# EAGLE board IoTKitV0.5 (EAGLE 6.5.0)
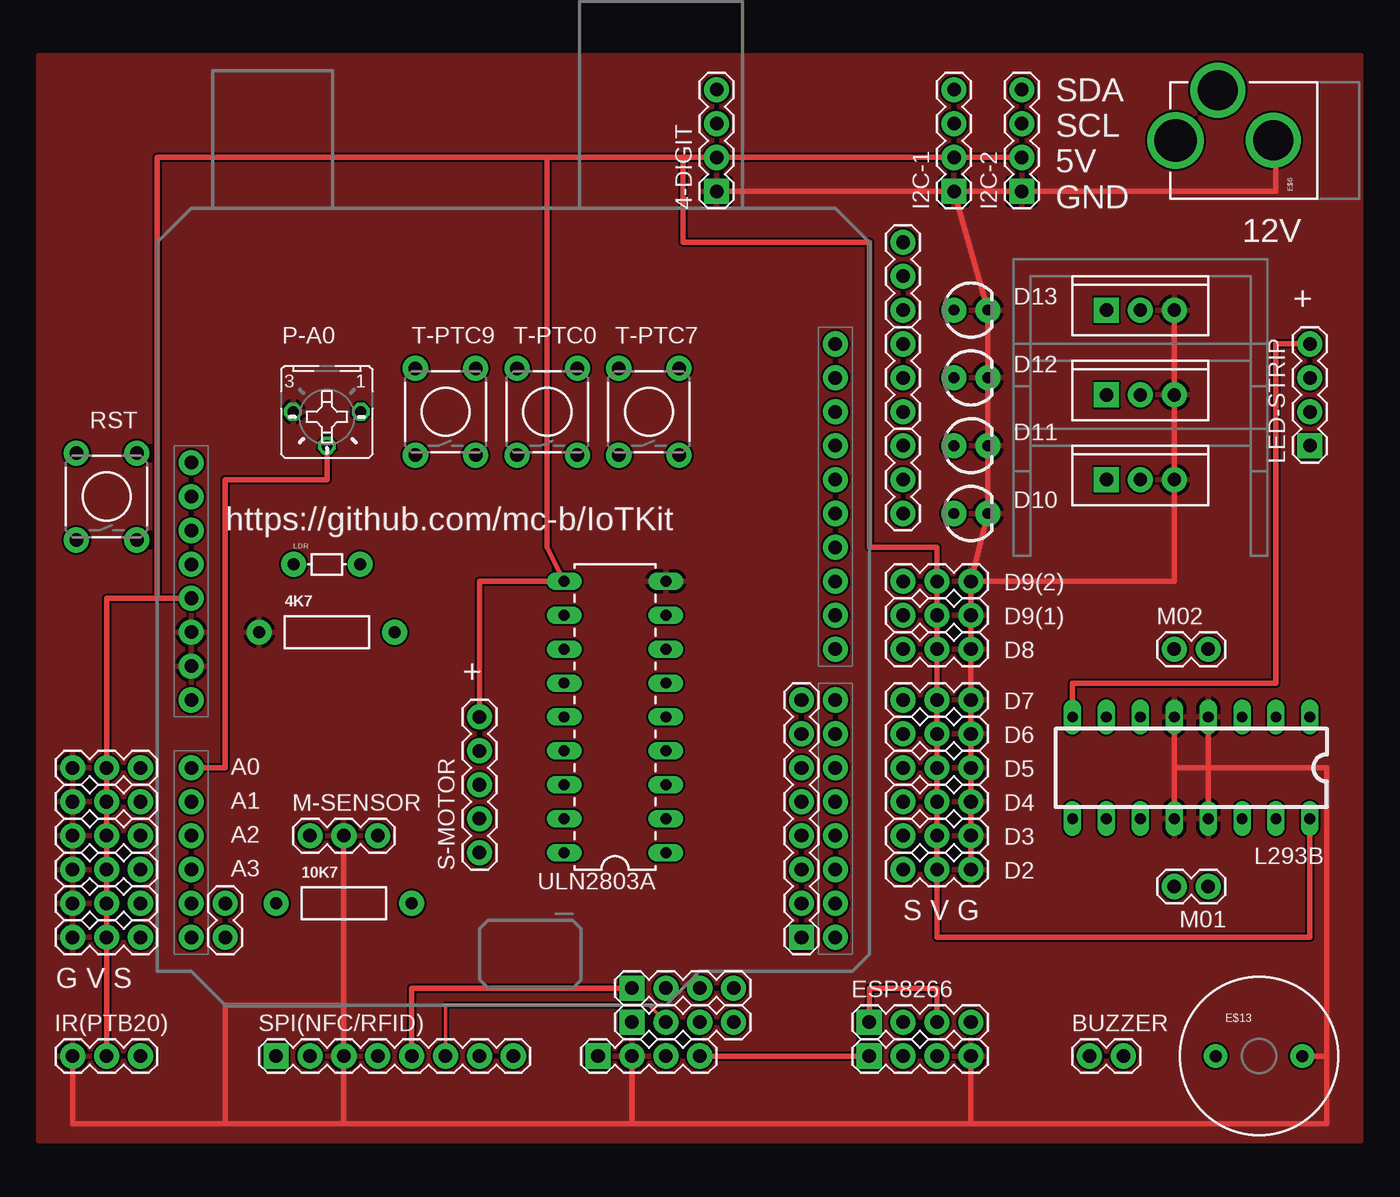
[diagram p0: board, top side]
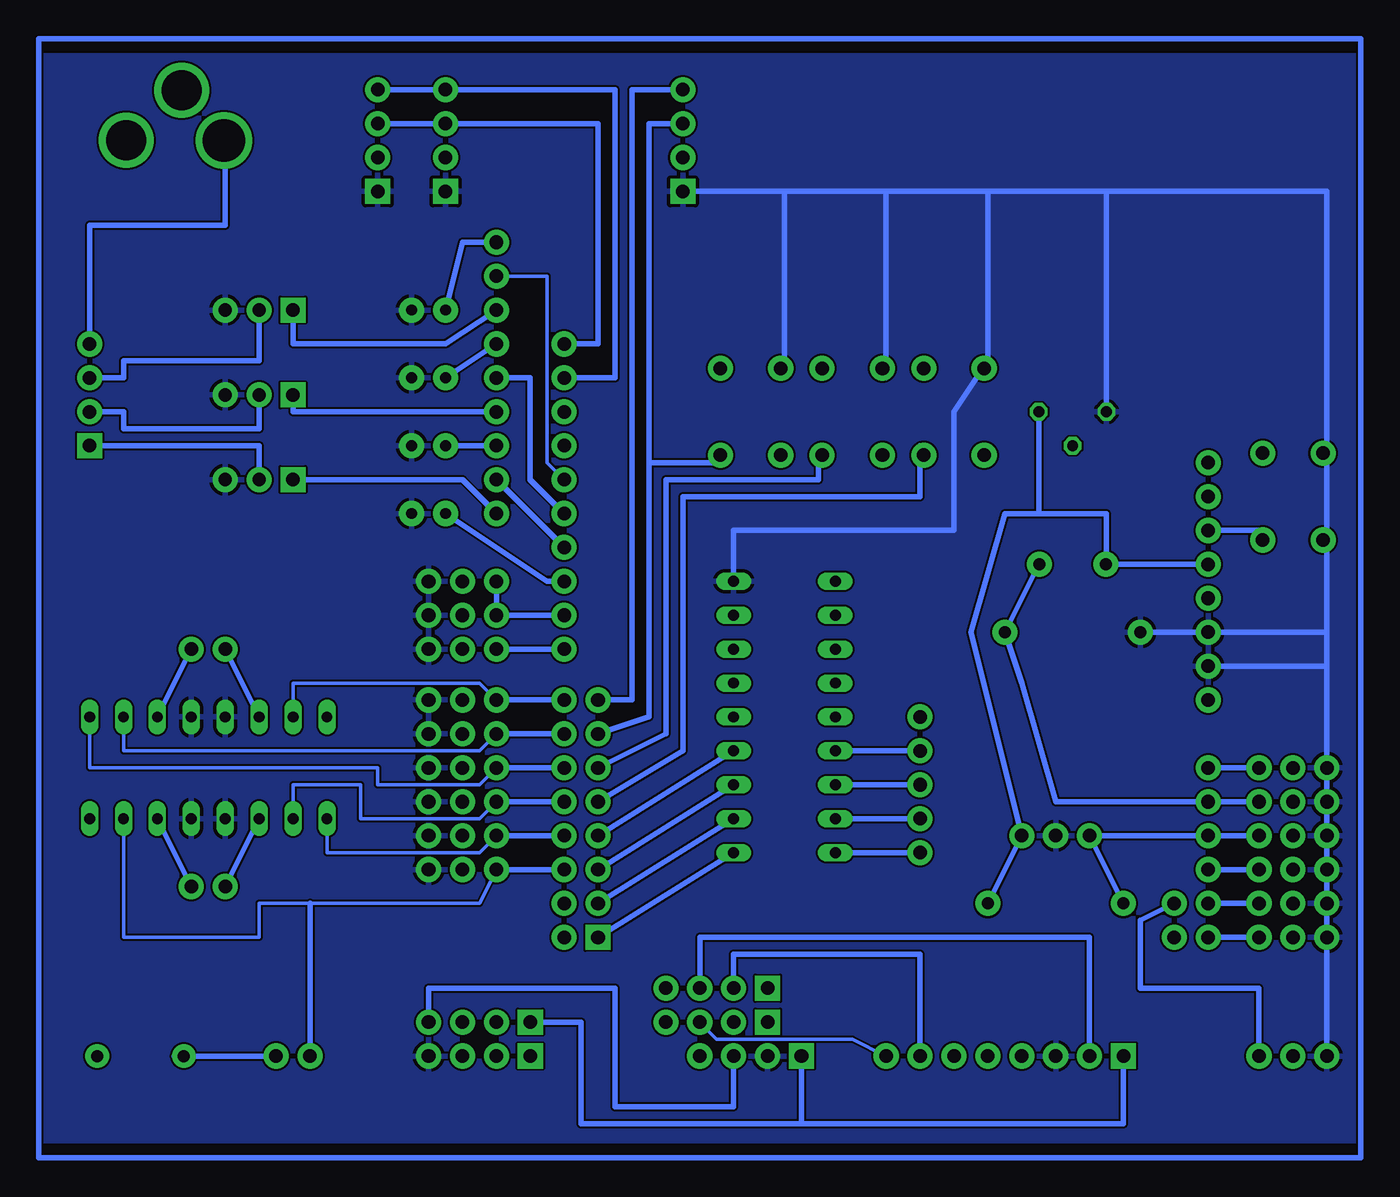
[diagram p1: board, bottom side, seen from below]

No outline drawn. Coordinates in mm, seen from the top.
Copper layers (1*16): Top 0.035mm / dielectric 1.5mm / Bottom 0.035mm
Design rules "Elecrow_2-layer_eagle_rule": minimum track width 6mil, minimum drill 12mil, track to track 6mil, track to pad 6mil, pad to pad 6mil, via to via 6mil, smd to smd 0mil, copper to edge 10mil, drill to drill 10mil, minimum pad ring 10mil, minimum via ring 6mil, stop-mask expansion 2mil, vias tented up to drill 100mil, thermal gap 10mil

## Footprints (pad centres in the part's own frame; a part is rotated, then mirrored left to right if it is on the bottom)
1X04 = drill 1.016 pad 1.88 square: 1 0,0 | drill 1.016 pad 1.88: 2 2.54,0; 3 5.08,0; 4 7.62,0
AXIAL-0.4 = drill 0.9 pad 1.88: P$1 -5.08,0; P$2 5.08,0
1X03 = drill 1.016 pad 1.88: 1 0,0; 2 2.54,0; 3 5.08,0
1X02 = drill 1.016 pad 1.88: 1 0,0; 2 2.54,0
LED3MM = drill 0.813 pad 1.88: A -1.27,0; K 1.27,0
UNO_R3_SHIELD_NOLABELS = drill 1.016 pad 1.88: 3.3V 50.8,26.67; 5V 50.8,29.21; A0 50.8,41.91; A1 50.8,44.45; A2 50.8,46.99; A3 50.8,49.53; A4 50.8,52.07; A5 50.8,54.61; AREF 2.54,15.24; D2 2.54,49.53; D3 2.54,46.99; D4 2.54,44.45; D5 2.54,41.91; D6 2.54,39.37; D7 2.54,36.83; D8 2.54,33.02; D9 2.54,30.48; D10 2.54,27.94; D11 2.54,25.4; D12 2.54,22.86; D13 2.54,20.32; GND@0 50.8,31.75; GND@1 50.8,34.29; GND@2 2.54,17.78; IOREF 50.8,21.59; NC 50.8,19.05; RES 50.8,24.13; RX 2.54,54.61; SCL 2.54,10.16; SDA 2.54,12.7; TX 2.54,52.07; VIN 50.8,36.83
TO220-IGO = drill 1 pad 1.88: GND 0,0; OUT 2.54,0 | drill 1 pad 1.88 square: IN -2.54,0
1X08 = drill 1.016 pad 1.88 square: 1 0,0 | drill 1.016 pad 1.88: 2 2.54,0; 3 5.08,0; 4 7.62,0; 5 10.16,0; 6 12.7,0; 7 15.24,0; 8 17.78,0
POWER_JACK_PTH_LOCK = drill 2.997 pad 4.115: GND 0.025,6.557; GNDBREAK 3.762,10.7 | drill 3.2 pad 4.115: PWR 0,13.878
BUZZER-12MM = drill 0.9 pad 1.778: + 3.25,0; - -3.25,0
DIL16 = drill 0.813 long: 1 -8.89,-3.81; 2 -6.35,-3.81; 3 -3.81,-3.81; 4 -1.27,-3.81; 5 1.27,-3.81; 6 3.81,-3.81; 7 6.35,-3.81; 8 8.89,-3.81; 9 8.89,3.81; 10 6.35,3.81; 11 3.81,3.81; 12 1.27,3.81; 13 -1.27,3.81; 14 -3.81,3.81; 15 -6.35,3.81; 16 -8.89,3.81
AXIAL-5MM = drill 0.9 pad 1.88: P$1 -2.5,0; P$2 2.5,0
B25P = drill 0.813 octagon: A -2.54,0; E 2.54,0; S 0,2.54
TACTILE-PTH = drill 1.016 pad 1.88: 1 -3.251,2.261; 2 3.251,2.261; 3 -3.251,-2.261; 4 3.251,-2.261
1X05 = drill 1.016 pad 1.88: 1 0,0; 2 2.54,0; 3 5.08,0; 4 7.62,0; 5 10.16,0
DIL18 = drill 0.813 long: 1 -10.16,-3.81; 2 -7.62,-3.81; 3 -5.08,-3.81; 4 -2.54,-3.81; 5 0,-3.81; 6 2.54,-3.81; 7 5.08,-3.81; 8 7.62,-3.81; 9 10.16,-3.81; 10 10.16,3.81; 11 7.62,3.81; 12 5.08,3.81; 13 2.54,3.81; 14 0,3.81; 15 -2.54,3.81; 16 -5.08,3.81; 17 -7.62,3.81; 18 -10.16,3.81

## Placement (x,y rotation side)
4-DIGIT  [1X04]  55.88,72.39 90 top
4K7  [AXIAL-0.4]  26.67,39.37 0 top
10K7  [AXIAL-0.4]  27.94,19.05 0 top
A0  [1X03]  12.7,29.21 180 top
A1  [1X03]  12.7,26.67 180 top
A2  [1X03]  12.7,24.13 180 top
A3  [1X03]  12.7,21.59 180 top
A4  [1X03]  12.7,19.05 180 top
A5  [1X03]  12.7,16.51 180 top
BUZZER  [1X02]  83.82,7.62 0 top
D2  [1X03]  69.85,21.59 0 top
D3  [1X03]  69.85,24.13 0 top
D4  [1X03]  69.85,26.67 0 top
D5  [1X03]  69.85,29.21 0 top
D6  [1X03]  69.85,31.75 0 top
D7  [1X03]  69.85,34.29 0 top
D8  [1X03]  69.85,38.1 0 top
D9(1)  [1X03]  69.85,40.64 0 top
D9(2)  [1X03]  69.85,43.18 0 top
D10  [LED3MM]  74.93,48.26 0 top
D11  [LED3MM]  74.93,53.34 0 top
D12  [LED3MM]  74.93,58.42 0 top
D13  [LED3MM]  74.93,63.5 0 top
E$1  [UNO_R3_SHIELD_NOLABELS]  67.31,71.12 180 top
E$2  [TO220-IGO]  87.63,57.15 0 top
E$3  [TO220-IGO]  87.63,63.5 0 top
E$4  [TO220-IGO]  87.63,50.8 0 top
E$5  [1X08]  62.23,16.51 90 top
E$6  [POWER_JACK_PTH_LOCK]  104.14,76.2 90 top
E$7  [1X03]  69.85,63.5 90 top
E$8  [1X02]  19.05,16.51 90 top
E$9  [1X03]  69.85,55.88 90 top
E$10  [1X04]  49.53,12.7 0 top
E$11  [1X04]  49.53,10.16 0 top
E$12  [1X04]  46.99,7.62 0 top
E$13  [BUZZER-12MM]  96.52,7.62 0 top
E$14  [1X04]  67.31,7.62 0 top
E$15  [1X03]  69.85,48.26 90 top
ESP8266  [1X04]  67.31,10.16 0 top
I2C-1  [1X04]  73.66,72.39 90 top
I2C-2  [1X04]  78.74,72.39 90 top
IR(PTB20)  [1X03]  7.62,7.62 0 top
L293B  [DIL16]  91.44,29.21 180 top
LDR  [AXIAL-5MM]  26.67,44.45 0 top
LED-STRIP  [1X04]  100.33,53.34 90 top
M01  [1X02]  92.71,20.32 180 top
M02  [1X02]  90.17,38.1 0 top
M-SENSOR  [1X03]  25.4,24.13 0 top
P-A0  [B25P]  26.67,55.88 180 top
RST  [TACTILE-PTH]  10.16,49.53 90 top
S-MOTOR  [1X05]  38.1,22.86 90 top
SPI(NFC/RFID)  [1X08]  22.86,7.62 0 top
T-PTC0  [TACTILE-PTH]  43.18,55.88 90 top
T-PTC7  [TACTILE-PTH]  50.8,55.88 90 top
T-PTC9  [TACTILE-PTH]  35.56,55.88 90 top
ULN2803A  [DIL18]  48.26,33.02 90 top

## Library data of the parts
4-DIGIT E$5 E$6 E$10-E$12 E$14 ESP8266 I2C-1 I2C-2 LED-STRIP S-MOTOR SPI(NFC/RFID) = SparkFun-Connectors
4K7 10K7 = SparkFun-Passives
A0 A1-A5 BUZZER D2-D8 D9(1) D9(2) E$7-E$9 E$15 IR(PTB20) LDR M01 M02 = SparkFun-Capacitors
D10-D13 = SparkFun-LED
E$1 = SparkFun-Boards
E$2-E$4 = SparkFun-PowerIC
E$13 M-SENSOR RST T-PTC0 T-PTC7 T-PTC9 = SparkFun-Electromechanical
L293B ULN2803A = SparkFun-AnalogIC
P-A0 = pot

## Nets
3V3: 10K7.P$2 E$1.3.3V M-SENSOR.3 P-A0.A
5V: 4-DIGIT.2 A0.2 A1.2 A2.2 A3.2 A4.2 A5.2 D2.2 D3.2 D4.2 D5.2 D6.2 D7.2 D8.2 D9(1).2 D9(2).2 E$1.5V I2C-1.2 I2C-2.2 IR(PTB20).2 L293B.16 S-MOTOR.5 ULN2803A.10
GND: 4-DIGIT.1 4K7.P$1 A0.3 A1.3 A2.3 A3.3 A4.3 A5.3 D2.3 D3.3 D4.3 D5.3 D6.3 D7.3 D8.3 D9(1).3 D9(2).3 D10.K D11.K D12.K D13.K E$1.GND@0 E$1.GND@1 E$2.OUT E$3.OUT E$4.OUT E$12.2 E$14.4 I2C-1.1 I2C-2.1 IR(PTB20).1 L293B.4 L293B.5 L293B.12 L293B.13 M-SENSOR.2 P-A0.E SPI(NFC/RFID).3 ULN2803A.9
S$1: E$12.1 ESP8266.1 ESP8266.3 SPI(NFC/RFID).1
S$2: E$4.GND LED-STRIP.1
S$3: E$2.GND LED-STRIP.2
S$4: E$3.GND LED-STRIP.3
S$5: E$12.3 ESP8266.4
S$6: E$12.4 E$14.1
S$7: D9(1).1 D9(2).1 E$1.D9
S$8: 4-DIGIT.4 E$5.8
S$9: E$1.D11 E$15.2
S$10: E$1.D12 E$9.2
S$11: D8.1 E$1.D8
S$12: E$1.D13 E$7.2
S$14: D11.A E$15.3
S$15: D12.A E$9.3
S$16: D13.A E$7.3
S$17: E$3.IN E$7.1
S$18: E$1.RES
S$19: E$5.1 ULN2803A.1
S$20: E$5.2 ULN2803A.2
S$21: E$5.3 ULN2803A.3
S$22: E$5.4 ULN2803A.4
S$23: S-MOTOR.1 ULN2803A.18
S$24: S-MOTOR.2 ULN2803A.17
S$25: S-MOTOR.3 ULN2803A.16
S$26: S-MOTOR.4 ULN2803A.15
S$27: L293B.6 M02.1
S$28: L293B.3 M02.2
S$29: L293B.14 M01.1
S$30: L293B.11 M01.2
S$31: E$2.IN E$9.1
S$32: A3.1 E$1.A3
S$33: A4.1 E$1.A4
S$34: E$4.IN E$15.1
S$35: A5.1 E$1.A5
S$36: 10K7.P$1 A2.1 E$1.A2 M-SENSOR.1
S$37: A0.1 E$1.A0 P-A0.S
S$38: E$10.3 SPI(NFC/RFID).2
S$39: E$11.3 SPI(NFC/RFID).8
S$40: E$10.2 SPI(NFC/RFID).7
S$41: E$10.1 SPI(NFC/RFID).5
S$42: E$11.2 SPI(NFC/RFID).6
S$47: BUZZER.2
S$50: 4K7.P$2 A1.1 E$1.A1
V12: L293B.8 LED-STRIP.4
W2: BUZZER.1 D2.1 E$1.D2 L293B.15
W3: D3.1 E$1.D3 L293B.9
W4: D4.1 E$1.D4 L293B.10
W5: D5.1 E$1.D5 L293B.1
W6: D6.1 E$1.D6 L293B.2
W7: D7.1 E$1.D7 L293B.7
W10: D10.A E$1.D10
WB20: E$8.2 IR(PTB20).3
WC0: E$5.6
WC7: E$5.5
WC9: 4-DIGIT.3 E$5.7
WSCL: E$1.SDA I2C-1.4 I2C-2.4
WSDA: E$1.SCL I2C-1.3 I2C-2.3

## Tracks (layer width: path | path; a pad name or v marks a point on that pad's centre or on a via)
3V3
  Bottom 0.406: E$1.3.3V 24.13,44.45 24.13,48.26 29.21,48.26 | 29.21,48.26 31.75,48.26 34.29,39.37 M-SENSOR.3 10K7.P$2 | P-A0.A 29.21,48.26
5V
  Top 0.406: 13.97,41.91 10.16,41.91 A0.2 A1.2 A2.2 A3.2 A4.2 A5.2 IR(PTB20).2 | 13.97,41.91 E$1.5V | 13.97,41.91 13.97,74.93 43.18,74.93 | 43.18,74.93 53.34,74.93 | 53.34,74.93 4-DIGIT.2 I2C-1.2 I2C-2.2 | 53.34,74.93 53.34,68.58 67.31,68.58 67.31,45.72 72.39,45.72 D9(2).2 D9(1).2 D8.2 D7.2 D6.2 D5.2 D4.2 D3.2 D2.2 72.39,16.51 100.33,16.51 L293B.16 | 43.18,74.93 43.18,45.72 ULN2803A.10 38.1,43.18 S-MOTOR.5
GND
  Top 0.406: 19.05,2.54 7.62,2.54 IR(PTB20).1 | 19.05,2.54 27.94,2.54 | 27.94,2.54 49.53,2.54 | 49.53,2.54 74.93,2.54 | 74.93,2.54 101.6,2.54 101.6,7.62 | 101.6,7.62 101.6,29.21 92.71,29.21 | L293B.13 92.71,29.21 | L293B.12 90.17,29.21 | L293B.5 90.17,29.21 | 90.17,29.21 92.71,29.21 | 92.71,29.21 L293B.4 | 99.06,7.62 101.6,7.62 | 27.94,11.43 SPI(NFC/RFID).3 27.94,2.54 | 27.94,11.43 19.05,11.43 19.05,2.54 | 4-DIGIT.1 I2C-1.1 | I2C-1.1 I2C-2.1 97.79,72.39 97.79,76.2 | I2C-1.1 D13.K D12.K D11.K D10.K D9(2).3 | E$3.OUT E$2.OUT E$4.OUT 90.17,43.18 D9(2).3 | 27.94,11.43 M-SENSOR.2 | E$12.2 49.53,2.54 | E$14.4 74.93,2.54 | D9(2).3 D9(1).3 D8.3 D7.3 D6.3 D5.3 D4.3 D3.3 D2.3
  Bottom 0.406: 7.62,39.37 E$1.GND@0 4K7.P$1 | 7.62,36.83 7.62,39.37 | E$1.GND@1 7.62,36.83 | 7.62,36.83 A0.3 A1.3 A2.3 A3.3 A4.3 A5.3 IR(PTB20).1 | 7.62,39.37 7.62,72.39 24.13,72.39 | 24.13,72.39 33.02,72.39 | 33.02,72.39 40.64,72.39 | 40.64,72.39 48.26,72.39 | 48.26,72.39 4-DIGIT.1 | 48.26,59.69 48.26,72.39 | 40.64,58.42 40.64,72.39 | 33.02,72.39 33.02,59.69 35.56,55.88 35.56,46.99 52.07,46.99 ULN2803A.9 | P-A0.E 24.13,72.39
  pour Top: 5.08,82.55 5.08,1.27 104.14,1.27 104.14,82.55
  pour Bottom: 5.08,82.55 5.08,1.27 104.14,1.27 104.14,82.55
S$1
  Top 0.406: ESP8266.1 67.31,12.7 72.39,12.7 ESP8266.3
  Bottom 0.406: SPI(NFC/RFID).1 22.86,2.54 46.99,2.54 | 46.99,2.54 63.5,2.54 63.5,10.16 ESP8266.1 | E$12.1 46.99,2.54
S$2
  Bottom 0.406: E$4.GND 87.63,53.34 LED-STRIP.1
S$3
  Bottom 0.406: E$2.GND 87.63,54.61 97.79,54.61 97.79,55.88 LED-STRIP.2
S$4
  Bottom 0.406: E$3.GND 87.63,59.69 97.79,59.69 97.79,58.42 LED-STRIP.3
S$5
  Bottom 0.406: E$12.3 52.07,3.81 60.96,3.81 60.96,12.7 74.93,12.7 ESP8266.4
S$6
  Top 0.406: E$12.4 E$14.1
S$7
  Bottom 0.406: E$1.D9 D9(1).1 D9(2).1
S$8
  Bottom 0.406: 4-DIGIT.4 59.69,80.01 59.69,34.29 E$5.8
S$9
  Bottom 0.406: E$1.D11 E$15.2
S$10
  Bottom 0.406: E$1.D12 67.31,50.8 67.31,58.42 E$9.2
S$11
  Bottom 0.406: D8.1 E$1.D8
S$12
  Bottom 0.254: E$7.2 66.04,66.04 66.04,52.07 E$1.D13
S$13
  Bottom 0.406: 5.08,0 104.14,0 104.14,83.82 5.08,83.82 5.08,0
S$14
  Bottom 0.406: E$15.3 D11.A
S$15
  Bottom 0.406: E$9.3 D12.A
S$16
  Bottom 0.406: E$7.3 72.39,68.58 D13.A
S$17
  Bottom 0.406: E$7.1 73.66,60.96 85.09,60.96 E$3.IN
S$18
  Bottom 0.406: E$1.RES 12.7,46.99
S$19
  Bottom 0.406: E$5.1 ULN2803A.1
S$20
  Bottom 0.406: E$5.2 ULN2803A.2
S$21
  Bottom 0.406: E$5.3 ULN2803A.3
S$22
  Bottom 0.406: E$5.4 ULN2803A.4
S$23
  Bottom 0.406: ULN2803A.18 S-MOTOR.1
S$24
  Bottom 0.406: ULN2803A.17 S-MOTOR.2
S$25
  Bottom 0.406: ULN2803A.16 S-MOTOR.3
S$26
  Bottom 0.406: ULN2803A.15 S-MOTOR.4
S$27
  Bottom 0.406: L293B.6 M02.1
S$28
  Bottom 0.406: L293B.3 M02.2
S$29
  Bottom 0.406: L293B.14 M01.1
S$30
  Bottom 0.406: L293B.11 M01.2
S$31
  Bottom 0.406: E$9.1 85.09,55.88 E$2.IN
S$32
  Bottom 0.406: E$1.A3 A3.1
S$33
  Bottom 0.406: E$1.A4 A4.1
S$34
  Bottom 0.406: E$15.1 72.39,50.8 E$4.IN
S$35
  Bottom 0.406: E$1.A5 A5.1
S$36
  Bottom 0.406: A2.1 E$1.A2 M-SENSOR.1 10K7.P$1
S$37
  Top 0.406: P-A0.S 26.67,50.8 19.05,50.8 19.05,29.21 E$1.A0
  Bottom 0.406: E$1.A0 A0.1
S$38
  Bottom 0.406: E$10.3 54.61,16.51 25.4,16.51 SPI(NFC/RFID).2
S$39
  Bottom 0.254: E$11.3 53.34,8.89 43.18,8.89 SPI(NFC/RFID).8
S$40
  Bottom 0.406: E$10.2 52.07,15.24 38.1,15.24 SPI(NFC/RFID).7
S$41
  Top 0.406: E$10.1 33.02,12.7 SPI(NFC/RFID).5
S$42
  Top 0.254: E$11.2 50.8,11.43 35.56,11.43 SPI(NFC/RFID).6
S$47
  Bottom 0.406: BUZZER.2 93.98,7.62
S$50
  Bottom 0.406: 29.21,44.45 4K7.P$2 30.48,35.56 27.94,26.67 E$1.A1 A1.1
V12
  Top 0.406: L293B.8 82.55,35.56 97.79,35.56 97.79,60.96 LED-STRIP.4
  Bottom 0.406: 90.17,76.2 90.17,69.85 100.33,69.85 LED-STRIP.4
W2
  Bottom 0.254: D2.1 71.12,19.05 83.82,19.05 87.63,19.05 87.63,16.51 97.79,16.51 L293B.15
  Bottom 0.406: D2.1 E$1.D2 | BUZZER.1 83.82,19.05
W3
  Bottom 0.254: D3.1 71.12,22.86 82.55,22.86 L293B.9
  Bottom 0.406: D3.1 E$1.D3
W4
  Bottom 0.254: D4.1 71.12,25.4 80.01,25.4 80.01,27.94 85.09,27.94 L293B.10
  Bottom 0.406: D4.1 E$1.D4
W5
  Bottom 0.254: D5.1 71.12,27.94 78.74,27.94 78.74,29.21 100.33,29.21 L293B.1
  Bottom 0.406: D5.1 E$1.D5
W6
  Bottom 0.254: D6.1 71.12,30.48 97.79,30.48 L293B.2
  Bottom 0.406: D6.1 E$1.D6
W7
  Bottom 0.254: D7.1 71.12,35.56 85.09,35.56 L293B.7
  Bottom 0.406: D7.1 E$1.D7
W10
  Bottom 0.406: E$1.D10 66.04,43.18 D10.A
WB20
  Bottom 0.406: E$8.2 21.59,17.78 21.59,12.7 12.7,12.7 IR(PTB20).3
WC0
  Bottom 0.406: 45.72,52.07 45.72,50.8 57.15,50.8 57.15,31.75 E$5.6
WC7
  Bottom 0.406: E$5.5 55.88,30.48 55.88,49.53 38.1,49.53 38.1,53.34
WC9
  Bottom 0.406: 58.42,52.07 58.42,33.02 E$5.7 | 58.42,52.07 53.34,52.07 | 4-DIGIT.3 58.42,77.47 58.42,52.07
WSCL
  Bottom 0.406: I2C-2.4 I2C-1.4 60.96,80.01 60.96,58.42 E$1.SDA
WSDA
  Bottom 0.406: I2C-2.3 I2C-1.3 62.23,77.47 62.23,60.96 E$1.SCL

## Text on the board
tNames: SDA / SCL / 5V / GND | 12V | + | https://github.com/mc-b/IoTKit | + | S V G | G V S